# Altium PCB PCB_Shield_for_Rovables_v2.PcbDoc
Units mil, origin at the board's own origin, x right, y up, seen from the top; angles counter-clockwise.
Board outline 715 x 1420 mil, 2 copper layers (Top Layer, Bottom Layer); 6 components, 20 nets, 69 pads, 38 vias.
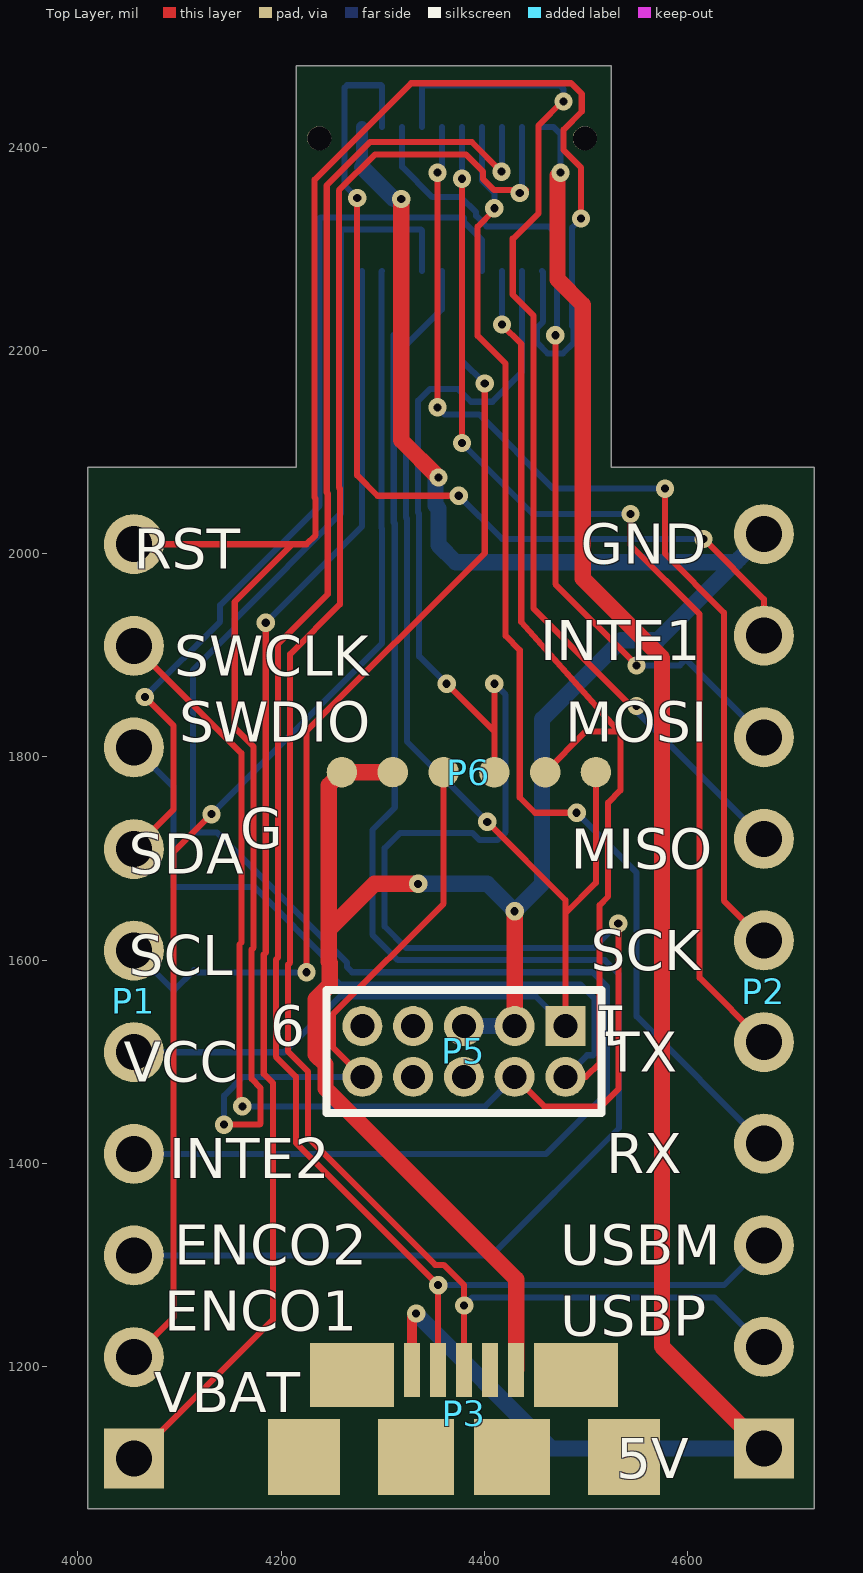
[diagram p0: Top Layer view]
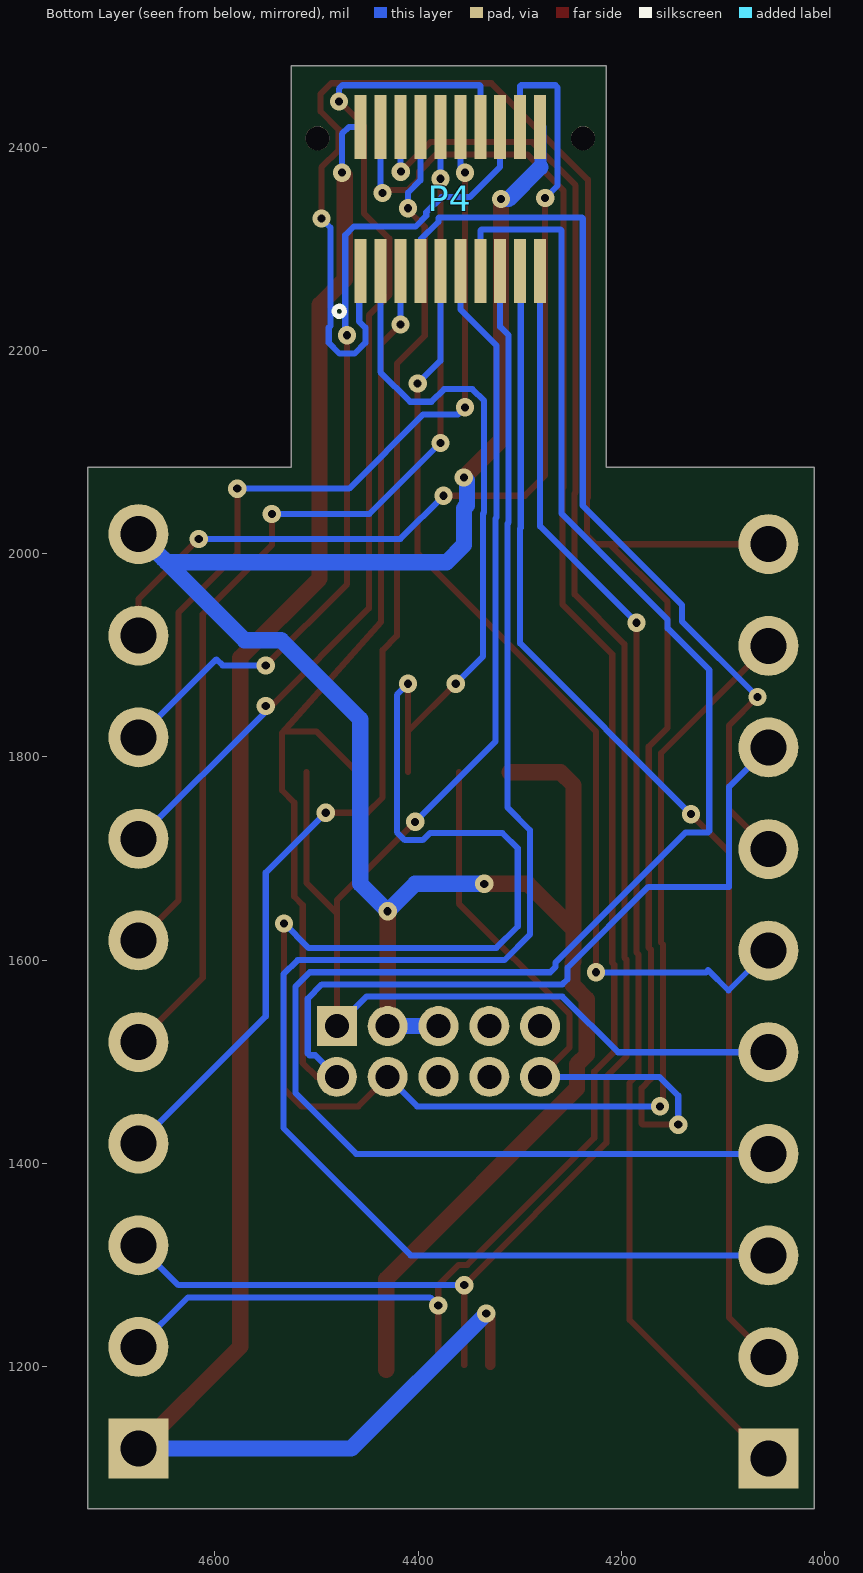
[diagram p1: Bottom Layer view, seen from below]

## Layer stack, top to bottom
Top Solder: solder mask 0.4, Solder Resist, Dk 3.5
Top Layer: signal copper 1.4
Dielectric 1: dielectric 12.6, FR-4, Dk 4.8
Bottom Layer: signal copper 1.4
Bottom Solder: solder mask 0.4, Solder Resist, Dk 3.5

## Board outline
4010,1060 4010,2085 4215,2085 4215,2480 4525,2480 4525,2085 4725,2085 4725,1060

## Design rules (kind name [scope] priority, off if disabled: settings)
Clearance [All] p1: gap=6 ignorepadtopadclearanceinfootprint=FALSE
PolygonConnect [All] p1: connectstyle=Relief reliefconductorwidth=10 reliefentries=4 polygonreliefangle="90 Angle" airgapwidth=10
RoutingVias [All] p1: holewidth=8 width=18 viastyle="Through Hole" minholewidth=8 minwidth=18 maxholewidth=50 maxwidth=50
SolderMaskExpansion [All] p1: expansion=4
Width [All] p1: maxlimit=20 minlimit=6 preferedwidth=6
30 further rules are at their usual default settings.

## Components (designator, comment, footprint, x,y, rotation, side; value= is the part's Value field where it differs from the comment)
P1 "10_pos_connector_2_54mm" 2_54mm_10_pos_connector 4055,1110 r90 top
P2 "10_pos_connector_2_54mm" 2_54mm_10_pos_connector 4675,1120 r90 top
P3 "microB USB Receptacle" "MicroB USB Standarad SMT" 4350,1245 r0 top
P4 "CONN HEADER 20POS" "DF12 20 POS" 4310,2355 r180 bottom
P5 "MHDR2X5" MHDR2X5 4480,1535 r180 top
P6 "6 pin smd 1.27mm female" "6pos 1.27mm" 4510,1785 r180 top

## Footprints (in the part's own frame and the unit in brackets; to place one, negate y for a bottom-side part, rotate by r counter-clockwise, add the part's x,y. Pads: shape width x height; smd on the part's side, far side on the other; paste and mask are expansions set on the pad)
2_54mm_10_pos_connector [mm]
  rect 1.5x1.5 hole 0.9: 1(-0.018,-0.007)
  round 1.5 hole 0.9: 2(2.522,-0.007) 3(5.062,-0.007) 4(7.602,-0.007) 5(10.142,-0.007) 6(12.682,-0.007) 7(15.222,-0.007) 8(17.762,-0.007) 9(20.302,-0.007) 10(22.842,-0.007)
"6pos 1.27mm" [mil]
  round 30 smd: 1(0,0) 2(49.96,0.09) 3(99.99,0.08) 4(150,0.07) 5(200.03,0.06) 6(250.04,0.07)
"DF12 20 POS" [mm]
  round 0.6 hole 0.6: 1(-4.801,1.366) 1(1.836,1.365)
  rect 0.3x1.6 smd mask+0.07: 1(-3.73,-1.947) 2(-3.73,1.653) 3(-3.229,-1.947) 4(-3.229,1.653) 5(-2.729,-1.947) 6(-2.729,1.653) 7(-2.23,-1.947) 8(-2.23,1.653) 9(-1.73,-1.947) 10(-1.73,1.653) 11(-1.23,-1.947) 12(-1.23,1.653) 13(-0.73,-1.947) 14(-0.73,1.653) 15(-0.236,-1.947) 16(-0.236,1.653) 17(0.264,-1.947) 18(0.265,1.653) 19(0.764,-1.947) 20(0.765,1.653)
  silkscreen extent -4.39,-3.09 -4.13,-2.83, body extent -5.12,-2.44 2.08,2.16, height 3.3
MHDR2X5 [mm] "Connector; Header; 5x2 Position"
  rect 1x1 hole 0.6: 1(0,0)
  round 1 hole 0.6: 2(0,1.27) 3(1.27,0) 4(1.27,1.27) 5(2.54,0) 6(2.54,1.27) 7(3.81,0) 8(3.81,1.27) 9(5.08,0) 10(5.08,1.27)
  silkscreen extent -0.9,-0.9 5.98,2.17
"MicroB USB Standarad SMT" [mm] "FOR ZX Series Hirose"
  rect 0.4x1.35 smd: 1(-0.533,-1.232) 2(0.119,-1.231) 3(0.769,-1.23) 4(1.419,-1.229) 5(2.069,-1.228)
  rect 1.8x1.9 smd: NC(-3.235,-3.405) NC(4.768,-3.403)
  rect 2.1x1.6 smd: NC(-2.033,-1.357) NC(3.568,-1.353)
  rect 1.9x1.9 smd: NC(-0.432,-3.404) NC(1.968,-3.403)
  body extent -3.25,-6.17 4.66,-0.51, height 2.78

## Part data
P3: digikey part number 2=609-4613-1-ND, manufacturer=ZX62-B-5PA(11), Digikey=H11634CT-ND
P4: digikey part number=H11743CT-ND, manufacturer="Hirose Electric Co Ltd", manufacturer part number=DF12D(4.0)-20DP-0.5V(81), Supplier 1=Digi-Key, Supplier Part Number 1=H11743CT-ND
P5: "Header, 5-Pin, Dual row", LatestRevisionDate=17-Jul-2002, LatestRevisionNote="Re-released for DXP Platform.", Publisher="Altium Limited"
P6: Digikey=S9005E-06-ND

## Via types
v1: diameter 18, hole 8, Top Layer to Bottom Layer, tented both sides, 38 vias

## Nets (pads, with @x,y where several pads share a name; then routed paths per layer and width w, separated by ;. In a path a pad name is that pad's centre, name@x,y a point inside that pad or via, vN(x,y) a via of type N, cw(c..) or ccw(c..) an arc to the next point about the centre after c; other vN are vias at no path point)
5V: P2.1 P3.1 P4.2 | length 1851.1
  Top Layer w6: v1@4329.01,1248.02 v1(4333,1252.01) ; v1(4475,2375) v1@4476.09,2373.91
  Top Layer w10: P3.1@4329.01,1201.51 v1@4329.01,1248.02
  Top Layer w16: v1(4475,2375) 4472.23,2372.23 4472.23,2269.77 4497,2245 4497,1975.53 4575,1897.53 4575,1219.55 P2.1
  Bottom Layer w6: P4.2 4468,2420.08 4475,2413.08 v1(4475,2375)
  Bottom Layer w16: v1(4333,1252.01) 4465.73,1119.28 P2.1
ENC_OUT1: P1.2 P4.17 | length 1170.7
  Top Layer w6: P1.2 4094,1248 4094,1706.11 v1(4131.5,1743.61)
  Bottom Layer w6: v1(4131.5,1743.61) 4299.59,1911.7 4299.59,2024.93 4299,2025.52 4299,2277.75 P4.17
ENC_OUT2: P1.3 P4.15 | length 1605.8
  Bottom Layer w6: P1.3 4407.28,1309.28 4532.69,1434.69 4532.69,1586 4518.69,1600 4315,1600 4290,1625 4290,1728 4312,1750 4312,2029.49 4311,2030.49 4311,2215 4319.29,2223.29 P4.15
GND: P2.10 P3.5 P4.20 P5.3 P5.5 P6.5 P6.6 | length 2355.6
  Top Layer w6: P5.5 P5.5@4385,1535
  Top Layer w16: P6.5 P6.6 4247,1771.97 4247,1630 ; v1(4318.4,2349) 4318.4,2111.6 v1(4355,2075) ; v1(4335,1675) 4292,1675 4247,1630 ; P5.3 v1(4430,1648) ; P3.5 4431.44,1285.92 4243.68,1473.68 4243.68,1497.28 4234,1506.96 4234,1561.47 4248,1575.47 4248,1590.02 4248,1597.46 4247,1598.46 4247,1630
  Bottom Layer w6: 4648,1992 4651,1995
  Bottom Layer w12: 4279.67,2380.33 P4.20@4279.67,2420.07
  Bottom Layer w16: 4279.67,2380.33 4311,2349 v1(4318.4,2349) ; v1(4335,1675) 4403,1675 v1(4430,1648) 4457,1675 4457,1836.97 4534.85,1914.82 4570.82,1914.82 4647.5,1991.5 ; v1(4355,2075) 4352,2072 4352,2047.47 4355,2044.47 4355,2008.5 4372,1991.5 4647.5,1991.5 ; P5.5 P5.3 ; 4648,1992 4647.5,1991.5 ; 4651,1995 P2.10
INT_ENC1: P2.9 P4.18 | length 951.6
  Top Layer w6: v1(4275,2350) 4275,2077 4295,2057 v1(4375,2057) ; v1(4615.91,2014.5) 4675.28,1955.13 P2.9
  Bottom Layer w6: v1(4275,2350) 4262.67,2362.33 4262.67,2458.67 4265,2461 4298.58,2461 4299.58,2460 P4.18 ; v1(4375,2057) 4417.5,2014.5 v1(4615.91,2014.5)
INT_ENC2: P1.4 P4.13 | length 1839.8
  Bottom Layer w6: P1.4 4460.96,1409.28 4520.69,1469 4520.69,1574 4506.69,1588 4270,1588 4265,1593 4265,1597.43 4136.81,1725.61 4114.89,1725.61 4113.5,1727 4113.5,1885.5 4154.5,1926.5 4154.5,1935.03 4259,2039.53 4259,2318 4260,2319 4337.74,2319 4338.74,2318 P4.13
MISO: P2.7 P4.14 | length 1046.8
  Top Layer w6: v1(4478,2445) 4477.5,2445.5 4453.5,2421.5 4453.5,2334.96 4428.54,2310 4428.09,2310 4428.09,2254.9 4448.5,2234.48 4448.5,1946.05 4544.55,1850 v1(4550,1850)
  Bottom Layer w6: P4.14 4338.73,2460 4339.73,2461 4474.5,2461 4478,2457.5 v1(4478,2445) ; v1(4550,1850) 4550,1844.55 P2.7
MOSI: P2.8 P4.16 | length 838.6
  Top Layer w6: v1(4470,2215) 4470,1970 v1(4550,1890)
  Bottom Layer w6: P4.16 4319.28,2380.72 4349,2351 4377,2351 4392,2336 4392,2332.54 4402.54,2322 4463.32,2322 4471.75,2313.58 4471.75,2216.75 v1(4470,2215) ; v1(4550,1890) 4592.55,1890 4598.55,1896 P2.8
RESET: P1.10 P4.1@4456.84,2278.35 P5.10 P6.4 | length 2393.1
  Top Layer w6: P1.10 4211.28,2009.28 ; v1(4144,1438) 4179,1438 4180,1439 4180,1474 4171,1483 4171,1610.3 4173,1612.3 4173,1810 4154.5,1828.5 4154.5,1952.5 4211.28,2009.28 ; P5.10 4251,1514 4251,1546.57 4360,1655.57 P6.4 ; v1(4495.23,2329.77) 4495.23,2380.23 4478.2,2397.26 4478.2,2417.39 4496,2435.19 4496,2452.46 4485.46,2463 4328,2463 4233,2368 4233,2055.09 4234,2054.09 4234,2018.28 4225,2009.28 4211.28,2009.28
  Bottom Layer w6: v1(4144,1438) 4144,1466.5 4162.5,1485 P5.10 ; P4.1@4456.84,2278.35 4458,2277.19 4458,2228.46 4452,2222.46 4452,2207.54 4462.54,2197 4477.46,2197 4488,2207.54 4488,2222.46 4486.46,2224 4486.46,2321 v1(4495.23,2329.77)
RX: P2.4 P4.8 | length 1153.4
  Top Layer w6: v1(4410,2340) 4410,2338.22 4393.5,2321.72 4393.5,2214.5 4421,2187 4421,1918.99 4435,1904.99 4435,1760 4450,1745 v1(4491,1745)
  Bottom Layer w6: P4.8 4397.78,2367.45 4410,2355.22 v1(4410,2340) ; v1(4491,1745) 4550,1686 4550,1544.55 P2.4
SCK: P2.6 P4.12 | length 1020.1
  Top Layer w6: v1(4354,2144) v1(4354,2375) ; v1(4578,2064) 4578,2000 4636,1942 4636,1658.55 P2.6
  Bottom Layer w6: v1(4354,2144) 4361,2137 4395,2137 4468,2064 v1(4578,2064) ; v1(4354,2375) 4358.41,2379.41 P4.12
SCL: P1.6 P4.9 | length 967.5
  Top Layer w6: v1(4225,1587.93) 4225,1825 4400.5,2000.5 v1(4400.5,2167.5)
  Bottom Layer w6: P1.6 4094.55,1570 4114.55,1590 4116.62,1587.93 v1(4225,1587.93) ; P4.9 4378.1,2189.9 v1(4400.5,2167.5)
SDA: P1.7 P4.7 | length 921.6
  Top Layer w6: P1.7 4094,1748 4094,1831 v1(4066,1859)
  Bottom Layer w6: v1(4066,1859) 4140.12,1933.12 4140.12,1949.41 4238,2047.29 4238,2330 4239,2331 4379.28,2331 4380,2330.28 4380,2326.58 4397.78,2308.8 P4.7
SWCLK: P1.9 P4.3 P5.4 P6.3 | length 2338.3
  Top Layer w6: P1.9 4161,1803.55 4161,1617.27 4159,1615.27 4159,1459 v1(4162,1456) ; v1(4363,1872) 4410.01,1824.99 ; P6.3 4410.01,1824.99 ; v1(4410.01,1872) 4410.01,1824.99 ; P5.4 4459,1456 4515,1456 4532,1473 v1(4532,1636)
  Bottom Layer w6: v1(4162,1456) 4401,1456 P5.4 ; v1(4363,1872) 4336,1899 4336,2039.43 4335,2040.43 4335,2150.46 4346.54,2162 4374.5,2162 4387,2149.5 4408,2149.5 4437.14,2178.64 P4.3 ; v1(4410.01,1872) 4421,1861.01 4421,1726 4413,1718 4395.54,1718 4388.54,1725 4317,1725 4302,1710 4302,1633 4323,1612 4508,1612 v1(4532,1636)
SWDIO: P1.8 P4.5 P5.2 P6.2 | length 1676.3
  Top Layer w6: v1(4417.46,2225.5) 4436.5,2206.46 4436.5,1932.61 4534,1823.2 ; P6.2 4500.13,1825 4532.2,1825 4534,1823.2 ; P5.2 4500,1485 4513.57,1498.57 4513.57,1654.12 4522,1662.54 4522,1755 4534,1767 4534,1823.2
  Bottom Layer w6: P1.8 4094,1770.55 4094,1672 4173.46,1672 4253,1592.46 4253,1581 4258,1576 4494.69,1576 4508.69,1562 4508.69,1508 4507,1506.31 4501.31,1506.31 P5.2 ; v1(4417.46,2225.5) P4.5
TX: P2.5 P4.10 | length 1080.1
  Top Layer w6: v1(4378.09,2108.91) v1(4378.09,2369) ; v1(4544,2039) 4544,2008.31 4612,1940.31 4612,1582.55 P2.5
  Bottom Layer w6: v1(4378.09,2108.91) 4448,2039 v1(4544,2039) ; v1(4378.09,2369) P4.10
USBM: P2.3 P3.2 P4.6 | length 1831.3
  Top Layer w6: P3.2@4354.68,1201.55 v1(4354.68,1280) 4214.68,1420 4214.68,1485.27 4195,1504.95 4195,1600.36 4197,1602.36 4197,1911 4246,1960 4246,2059.06 4245,2060.06 4245,2362.43 4287.57,2405 4388,2405 v1(4417,2376)
  Bottom Layer w6: v1(4354.68,1280) 4636,1280 P2.3 ; v1(4417,2376) 4417.45,2376.45 P4.6
USBP: P2.2 P3.3 P4.4 | length 1863.6
  Top Layer w6: P3.3@4380.26,1201.58 v1(4380.26,1260) 4380.26,1279.88 4360.14,1300 4351.65,1300 4226.68,1424.97 4226.68,1490.24 4207,1509.92 4207,1595.38 4209,1597.38 4209,1901 4258,1950 4258,2064.03 4257,2065.03 4257,2357.46 4292.54,2393 4382,2393 4399,2376 4399,2368.54 4409.54,2358 4441.09,2358 4438.09,2355 v1(4435,2355)
  Bottom Layer w6: v1(4380.26,1260) 4388.26,1268 4626.55,1268 P2.2 ; v1(4435,2355) 4437.13,2357.13 P4.4
VBAT: P1.1 P4.19 | length 1269.6
  Top Layer w6: P1.1 4192,1246 4192,1479 4183,1488 4183,1605.33 4185,1607.33 v1(4185,1931.92)
  Bottom Layer w6: v1(4185,1931.92) 4279.91,2026.82 P4.19
VCC: P1.5 P4.11 P5.1 P6.1 | length 1433.9
  Top Layer w6: v1(4403,1736) 4480,1659 4480,1646 ; P5.1 4480,1646 ; P6.1 4510,1676 4480,1646
  Bottom Layer w6: P1.5 4203.28,1509.28 4258,1564 4451,1564 P5.1 ; P4.11 4358.42,2240.42 4323,2205 4323,2035.46 4324,2034.46 4324,1815 v1(4403,1736)
pads on no net: P3.4 P3.NC P4.1@4237.72,2408.75 P4.1@4499.01,2408.77 P5.6 P5.7 P5.8 P5.9

## Silkscreen, mask and mechanical layers (free items; w line width, h text height)
Top Overlay:
  text "GND" at 4495,1990 h39.37
  text "RST" at 4055,1985 h39.37
  text "INTE1" at 4455,1895 h39.37
  text "SWCLK" at 4095,1880 h39.37
  text "SWDIO" at 4100,1815 h39.37
  text "MOSI" at 4480,1815 h39.37
  text "G" at 4160,1710 h39.37
  text "MISO" at 4485,1690 h39.37
  text "SDA" at 4050,1685 h39.37
  text "SCK" at 4505,1590 h39.37
  text "SCL" at 4050,1585 h39.37
  text "TX" at 4520,1490 h39.37
  text "VCC" at 4045,1480 h39.37
  text "RX" at 4520,1390 h39.37
  text "INTE2" at 4090,1385 h39.37
  text "ENCO2" at 4095,1300 h39.37
  text "USBM" at 4475,1300 h39.37
  text "ENCO1" at 4085,1235 h39.37
  text "USBP" at 4475,1230 h39.37
  text "VBAT" at 4075,1155 h39.37
  text "5V" at 4530,1090 h39.37
Mechanical 1:
  the board outline again, w5
  text "36mm x 18mm" at 4690,2220 h30

## Text inside footprints (layer, text, board x,y; h text height)
P5: Top Overlay "1" at 4542.99,1555 h39.37 r180; Top Overlay "9" at 4224.09,1555 h39.37 r180